# Altium PCB P2_ver1.PcbDoc
Units mm, origin at the board's own origin, x right, y up, seen from the top; angles counter-clockwise.
Board outline 42.75 x 59.76 mm, 2 copper layers (Top Layer, Bottom Layer); 69 components, 47 nets, 239 pads, 32 vias.
Unrouted connection lines stored in the file: 3.
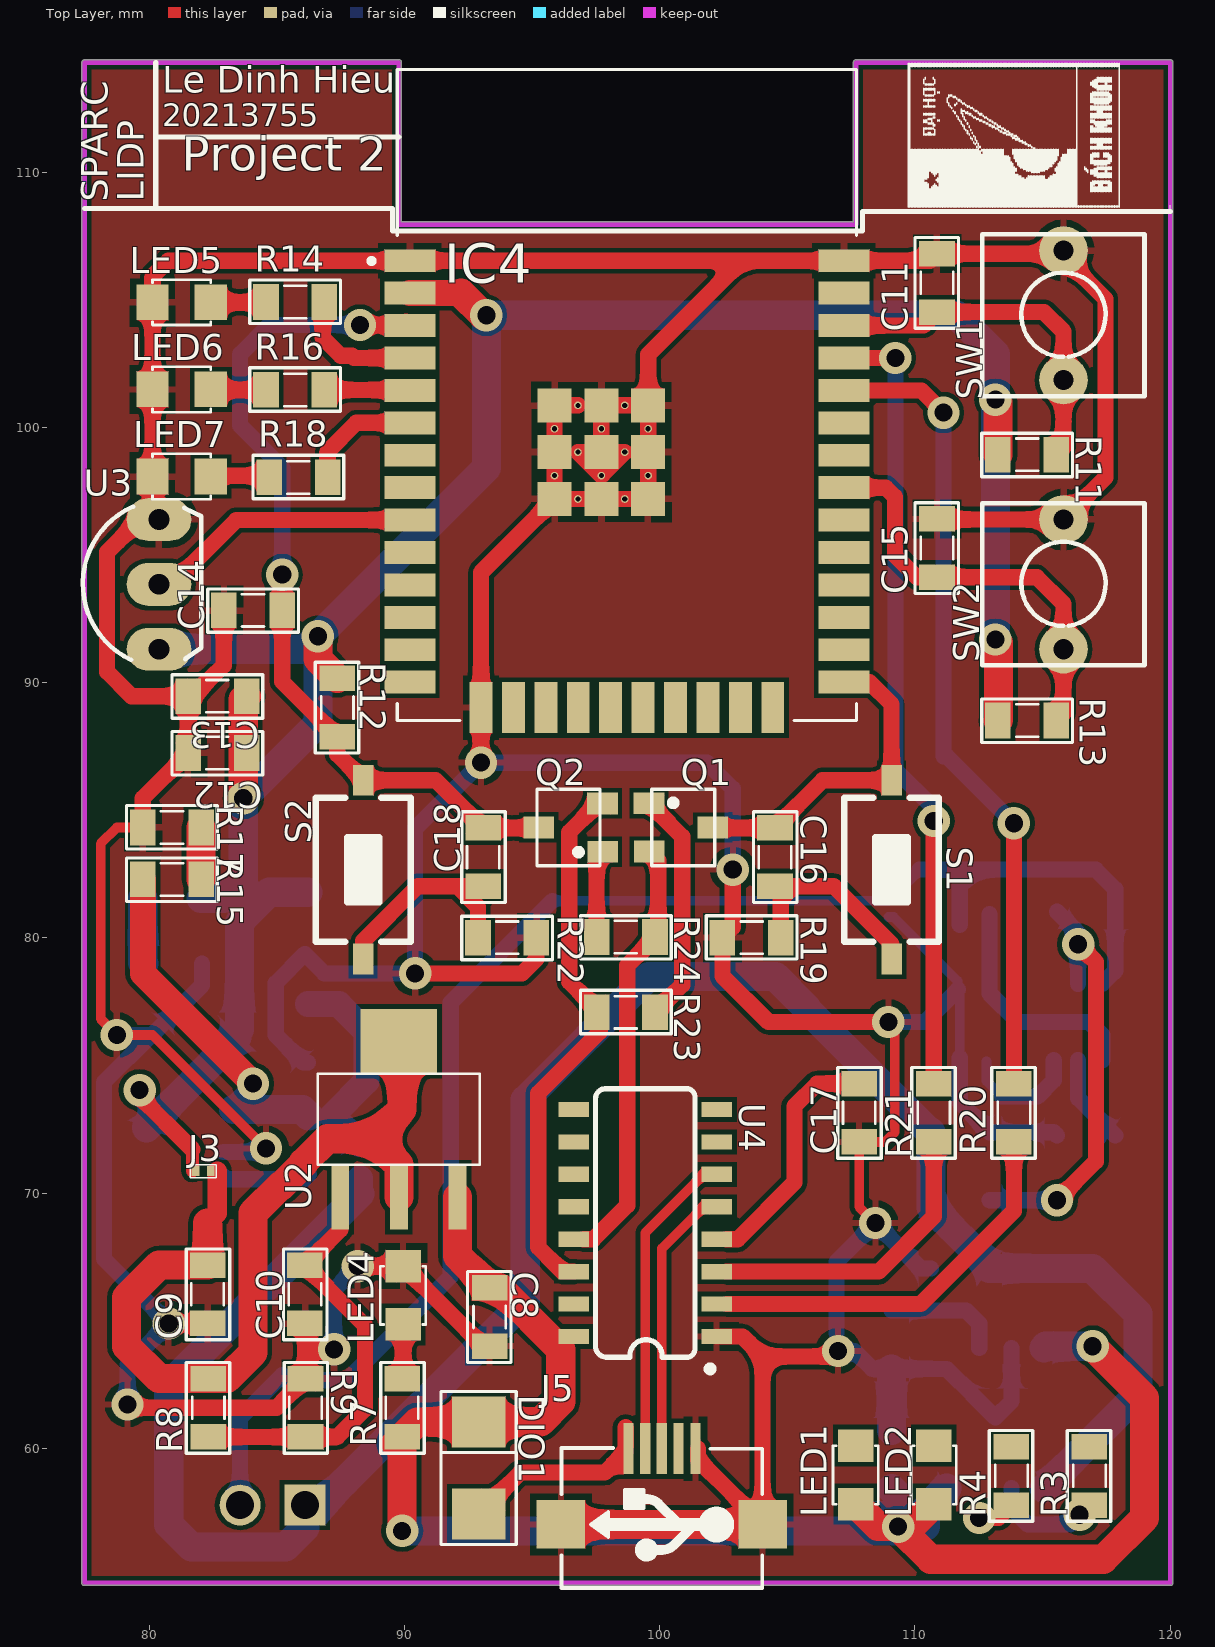
[diagram p0: Top Layer view]
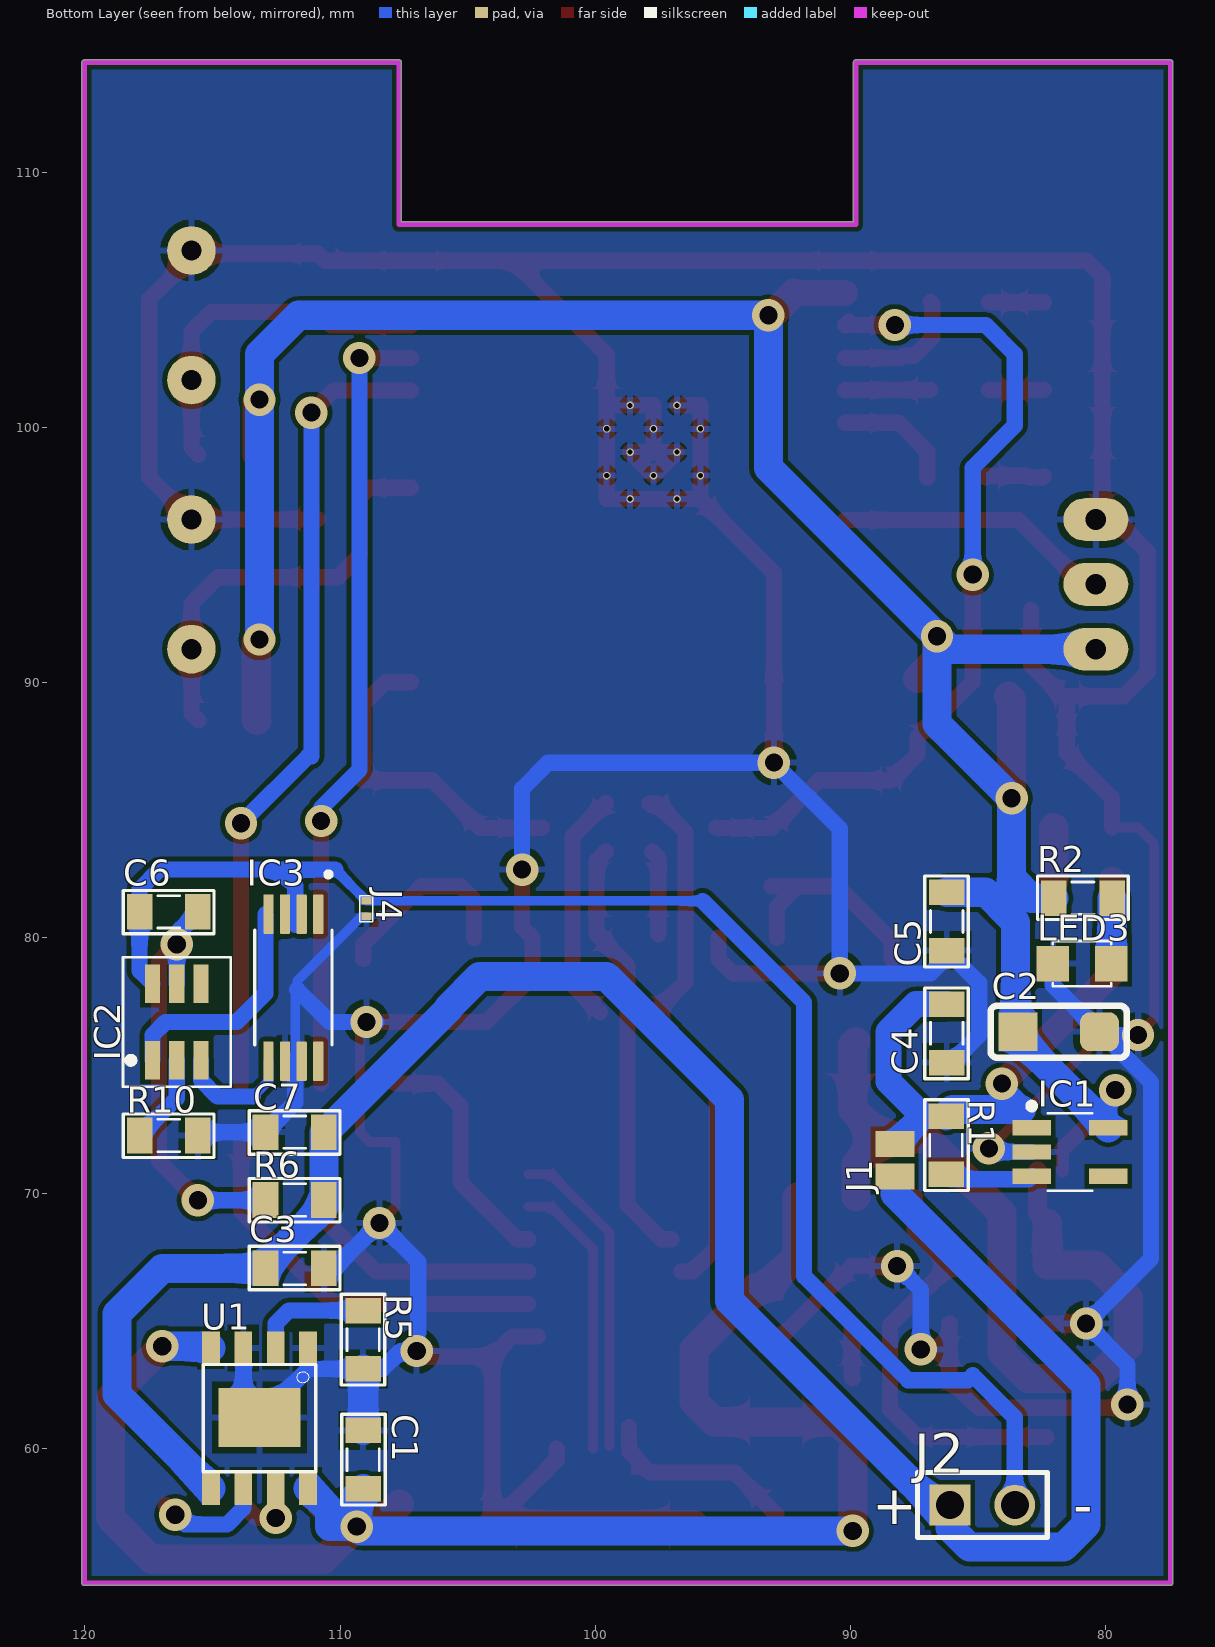
[diagram p1: Bottom Layer view, seen from below]
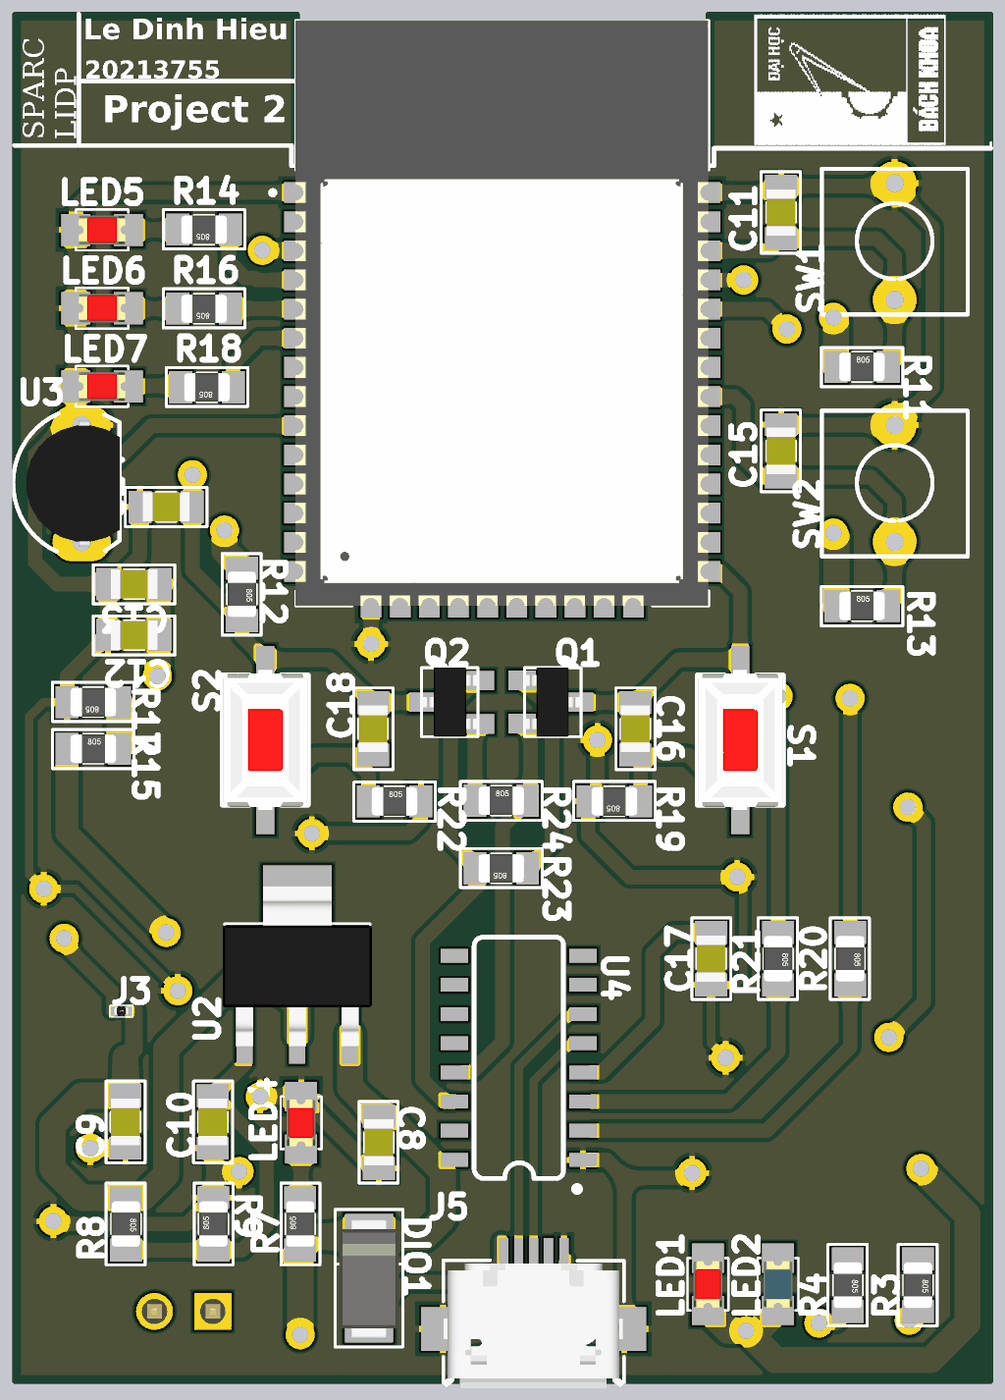
[diagram p2: 3D render of the assembled board from above, using the file's embedded part models]
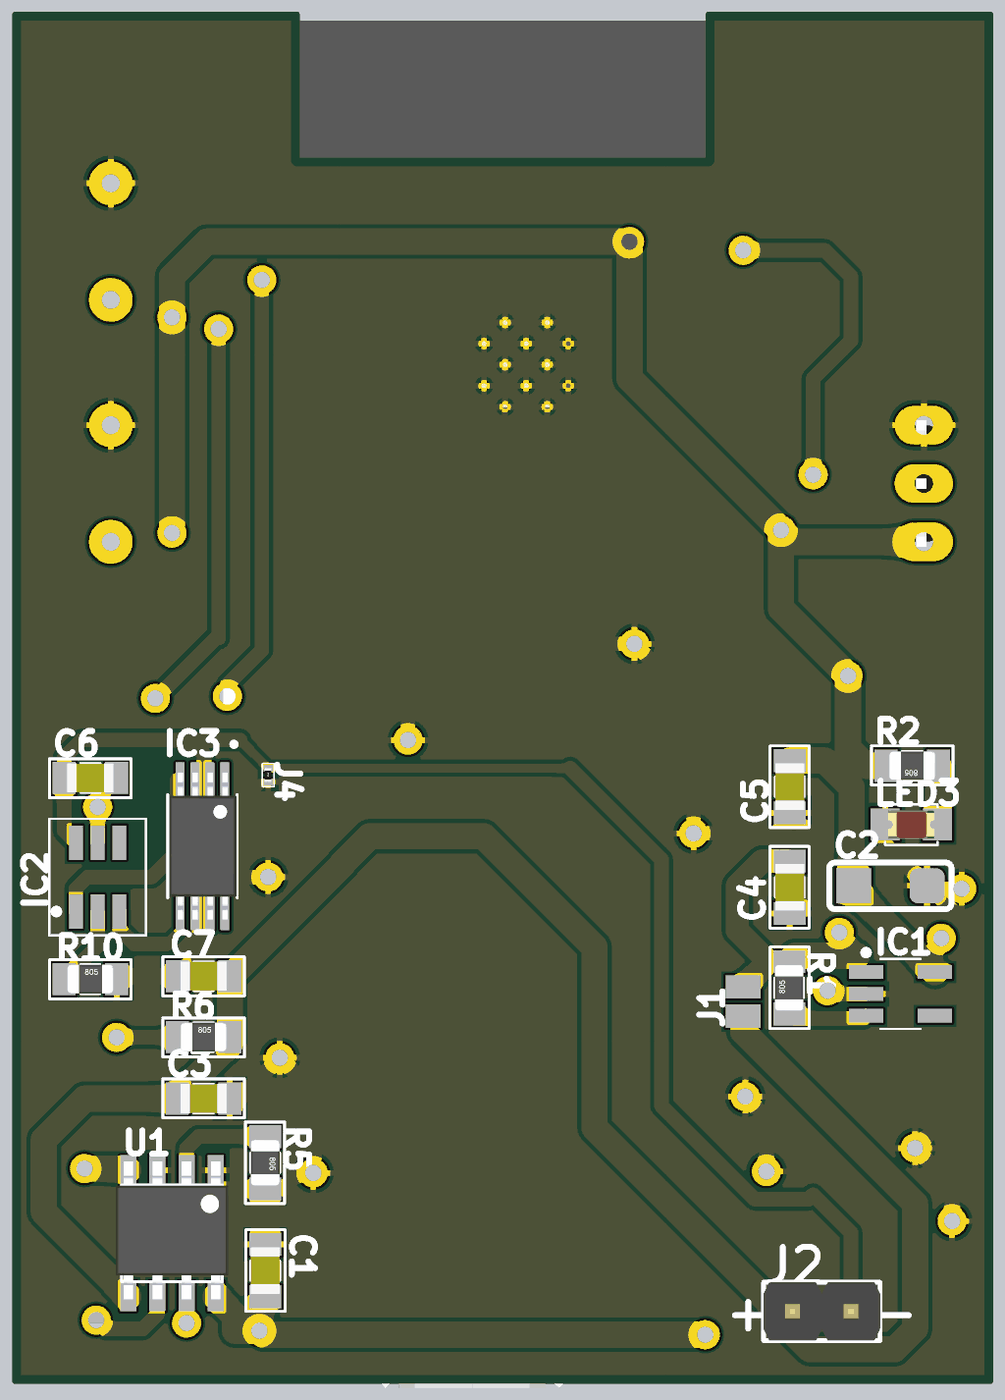
[diagram p3: 3D render of the assembled board from below, using the file's embedded part models]

## Layer stack, top to bottom
Top Solder: solder mask 0.0102, Solder Resist, Dk 3.5
Top Layer: signal copper 0.0356
Dielectric 1: dielectric 0.32, FR-4, Dk 4.8
Bottom Layer: signal copper 0.0356
Bottom Solder: solder mask 0.0102, Solder Resist, Dk 3.5

## Board outline
77.37,54.737 77.37,114.3 cw(c77.47,114.3) 77.47,114.4 89.789,114.4 cw(c89.789,114.3) 89.889,114.3 89.889,108.05 107.596,108.05 107.596,114.3 cw(c107.696,114.3) 107.696,114.4 120.015,114.4 cw(c120.015,114.3) 120.115,114.3 120.115,54.737 cw(c120.015,54.737) 120.015,54.637 77.47,54.637 cw(c77.47,54.737)

## Design rules (kind name [scope] priority, off if disabled: settings)
Clearance [All] p1: gap=0.178 ignorepadtopadclearanceinfootprint=FALSE
PolygonConnect [All] p1: connectstyle=Relief reliefconductorwidth=0.254 reliefentries=4 polygonreliefangle="90 Angle" airgapwidth=0.254
RoutingVias [All] p1: holewidth=0.711 width=1.27 viastyle="Through Hole" minholewidth=0.711 minwidth=1.27 maxholewidth=0.711 maxwidth=1.27
SilkToSolderMaskClearance [IsPad] p1: minsilkscreentomaskgap=0.203 clearancetoexposedcopper=TRUE
SolderMaskExpansion [All] p1: expansion=0.102
Width [All] p1: maxlimit=1.143 minlimit=0.381 preferedwidth=0.635
29 further rules are at their usual default settings.

## Classes and differential pairs
component class U_MCU: C11 C12 C13 C14 C15 C16 C17 C18 DIO1 IC4 J5 LED5 LED6 LED7 Q1 Q2 R11 R12 R13 R14 R15 R16 R17 R18 R19 R20 R21 R22 R23 R24 S1 S2 SW1 SW2 U3 U4
component class U_Lipo_Power: C1 C2 C3 C4 C5 C6 C7 C8 C10 IC1 IC2 IC3 J1 J2 J3 J4 LED1 LED2 LED3 LED4 R1 R2 R3 R4 R5 R6 R7 R8 R9 R10 U1 U2

## Components (designator, comment, footprint, x,y, rotation, side; value= is the part's Value field where it differs from the comment)
C1 "104" CAP_0805 109.093,59.563 r90 bottom value=33p
C2 "220uF" CAP_TANTALUM_3216 81.849,76.327 r180 bottom
C3 "104" CAP_0805 111.779,67.056 r0 bottom value=33p
C4 "1uF" CAP_0805 86.233,76.263 r270 bottom value=33p
C5 "1uF" CAP_0805 86.233,80.645 r270 bottom value=33p
C6 "100nF" CAP_0805 116.713,81.026 r180 bottom value=33p
C7 "100nF" CAP_0805 111.779,72.39 r180 bottom value=33p
C8 "104" CAP_0805 93.345,65.151 r270 top value=33p
C9 "104" CAP_0805 82.296,66.04 r90 top value=33p
C10 "104" CAP_0805 86.106,66.04 r90 top value=33p
C11 "104" CAP_0805 110.871,105.664 r270 top value=33p
C12 "22uF" CAP_0805 82.677,87.249 r0 top value=33p
C13 "0.1uF" CAP_0805 82.677,89.471 r0 top value=33p
C14 "0.1uF" CAP_0805 84.074,92.837 r0 top value=33p
C15 "104" CAP_0805 110.871,95.275 r270 top value=33p
C16 "104" CAP_0805 104.521,83.168 r90 top value=33p
C17 "0.1uF" CAP_0805 107.823,73.152 r90 top value=33p
C18 "104" CAP_0805 93.091,83.168 r90 top value=33p
DIO1 "Diode SMD" DIO-214AC(SMA) 92.964,59.309 r270 top value=1N5007
IC1 "RT9013" SOT23-5 81.407,71.615 r180 bottom
IC2 "DW01A" SOT23-6 116.397,76.708 r90 bottom
IC3 "FS8205A" FS8205A 111.887,78.052 r270 bottom
IC4 "ESP32-WROOM-32" MODULE_ESP32-WROOM-32 98.72,101.271 r0 top
J1 "Jumper2" JUMPER2 88.265,71.92 r90 bottom
J2 "VBAT_IN" JP2-D1T 86.106,57.785 r180 bottom
J3 "Jumper2" RES-SMD-0201 82.123,70.866 r180 top
J4 "Jumper2" RES-SMD-0201 108.966,81.153 r270 bottom
J5 "USB-5" USB-M1 100.089,59.991 r180 top
LED1 "LED" LED-0805-Red 107.683,57.823 r90 top value="LED 3 ly Single Colour"
LED2 "LED" LED-0805-Blue 110.74,57.823 r90 top value="LED 3 ly Single Colour"
LED3 "" LED-0805-Red 79.792,78.994 r0 bottom value="LED 3 ly Single Colour"
LED4 "LED" LED-0805-Red 89.954,64.859 r90 top value="LED 3 ly Single Colour"
LED5 "LED" LED-0805-Red 82.423,104.902 r180 top value="LED 3 ly Single Colour"
LED6 "LED" LED-0805-Red 82.423,101.492 r180 top value="LED 3 ly Single Colour"
LED7 "LED" LED-0805-Red 82.423,98.082 r180 top value="LED 3 ly Single Colour"
Q1 "2SC1815" SOT23D 100.838,84.328 r270 top value=C1815
Q2 "2SC1815" SOT23D 96.52,84.328 r90 top value=C1815
R1 "10k" RES-SMD-0805 86.258,71.882 r90 bottom
R2 "1k" RES-SMD-0805 80.897,81.559 r0 bottom
R3 "1000" RES-SMD-0805 116.84,58.928 r270 top
R4 "1000" RES-SMD-0805 113.784,58.928 r270 top
R5 "1200" RES-SMD-0805 109.093,64.262 r270 bottom
R6 "0.1k" RES-SMD-0805 111.779,69.736 r180 bottom
R7 "500" RES-SMD-0805 89.916,61.595 r90 top
R8 "Resistor - SMD" RES-SMD-0805 82.321,61.595 r270 top
R9 "Resistor - SMD" RES-SMD-0805 86.131,61.595 r90 top
R10 "1k" RES-SMD-0805 116.713,72.263 r180 bottom
R11 "Resistor - SMD" RES-SMD-0805 114.402,98.933 r0 top
R12 "10K" RES-SMD-0805 87.376,89.027 r270 top
R13 "Resistor - SMD" RES-SMD-0805 114.402,88.519 r0 top
R14 "1000" RES-SMD-0805 85.725,104.915 r180 top
R15 "Resistor - SMD" RES-SMD-0805 80.899,82.296 r0 top
R16 "1000" RES-SMD-0805 85.725,101.473 r180 top
R17 "Resistor - SMD" RES-SMD-0805 80.899,84.328 r180 top
R18 "1000" RES-SMD-0805 85.852,98.044 r180 top
R19 "10k" RES-SMD-0805 103.607,80.01 r180 top
R20 "0R" RES-SMD-0805 113.881,73.152 r270 top
R21 "0R" RES-SMD-0805 110.744,73.152 r270 top
R22 "10k" RES-SMD-0805 94.031,80.01 r0 top
R23 "1000" RES-SMD-0805 98.679,77.089 r180 top
R24 "1000" RES-SMD-0805 98.679,80.035 r0 top
S1 "SW-SMD" SW-SMD 109.093,82.677 r90 top
S2 "SW-SMD" SW-SMD 88.392,82.677 r90 top
SW1 "SW" SW2 115.824,106.934 r270 top value="SW chip 2 pin"
SW2 "SW" SW2 115.824,96.393 r270 top value="SW chip 2 pin"
U1 "TP4056" TP4056 113.157,61.189 r270 bottom
U2 "LM1117-ADJ" LM1117-SOP 89.789,71.12 r0 top
U3 "LM35" QTO-92 80.391,93.853 r90 top
U4 "CH340C" SOP-16 99.441,68.834 r90 top

## Footprints (in the part's own frame and the unit in brackets; to place one, negate y for a bottom-side part, rotate by r counter-clockwise, add the part's x,y. Pads: shape width x height; smd on the part's side, far side on the other; paste and mask are expansions set on the pad)
CAP_0805 [mil]
  rect 39.37x55 smd: 1(-45,0) 2(45,0)
  silkscreen extent -70,-34 70,33, body extent -40,-25 40,25, height 24
CAP_TANTALUM_3216 [mil]
  rect 60x60 smd: 1(-62.99,0)
  rrect50% 60x60 smd: 2(62.99,0)
  silkscreen extent -105,-40 105,40, body extent -67,-35 67,35, height 67
DIO-214AC(SMA) [mm] "DO-214AC Diode Smallest Size"
  rect 2x2.1 smd: 1(1.88,-0.051) 2(-1.732,-0.051)
  silkscreen extent -2.92,-1.52 3.07,1.42, body extent -2.5,-1.35 2.7,1.25, height 2.4
FS8205A [mm]
  rrect25% 1.56x0.4 smd: 1(-2.88,1.031) 2(-2.88,0.381) 3(-2.88,-0.269) 4(-2.88,-0.919) 5(2.88,-0.919) 6(2.88,-0.269) 7(2.88,0.381) 8(2.88,1.031)
  silkscreen extent -4.54,-1.46 2.25,1.57, body extent -3.2,-1.4 3.2,1.53, height 1.2
JP2-D1T [mm] "2 pins, 1 row, straight, gold plating"
  rect 1.6x1.6 hole 1.1: 1(0,0)
  round 1.6 hole 1.1: 2(2.54,0)
  silkscreen extent -1.27,-1.27 3.81,1.27, body extent -1.27,-1.27 3.81,1.27, height 8.54
JUMPER2 [mil]
  rect 40x60 smd: 1(-50,0) 2(0,0)
LED-0805-Blue [mil]
  rect 50x55 smd: 1(0,0) 2(90,0)
  silkscreen extent 0,-35 90,35, body extent 5,-25 85,25, height 43
LED-0805-Red [mil]
  rect 50x55 smd: 1(0,0) 2(90,0)
  silkscreen extent 0,-35 90,35, body extent 5,-25 85,25, height 43
LM1117-SOP [mm]
  rect 0.7x2.54 smd: 1(-2.3,-1.27) 2(0,-1.27) 3(2.3,-1.27)
  rect 3x2.54 smd: 2(0,4.826)
  silkscreen extent -3.17,0 3.17,3.56, body extent -3.25,-1.78 3.25,5.18, height 1.68
MODULE_ESP32-WROOM-32 [mm]
  rect 2x0.9 smd: 1(-8.5,5.26) 2(-8.5,3.99) 3(-8.5,2.72) 4(-8.5,1.45) 5(-8.5,0.18) 6(-8.5,-1.09) 7(-8.5,-2.36) 8(-8.5,-3.63) 9(-8.5,-4.9) 10(-8.5,-6.17) 11(-8.5,-7.44) 12(-8.5,-8.71) 13(-8.5,-9.98) 14(-8.5,-11.25) 25(8.5,-11.25) 26(8.5,-9.98) 27(8.5,-8.71) 28(8.5,-7.44) 29(8.5,-6.17) 30(8.5,-4.9) 31(8.5,-3.63) 32(8.5,-2.36) 33(8.5,-1.09) 34(8.5,0.18) 35(8.5,1.45) 36(8.5,2.72) 37(8.5,3.99) 38(8.5,5.26)
  rect 0.9x2 smd: 15(-5.715,-12.25) 16(-4.445,-12.25) 17(-3.175,-12.25) 18(-1.905,-12.25) 19(-0.635,-12.25) 20(0.635,-12.25) 21(1.905,-12.25) 22(3.175,-12.25) 23(4.445,-12.25) 24(5.715,-12.25)
  rect 1.33x1.33 smd: 39_1(-2.835,-0.405) 39_2(-1,-0.405) 39_3(0.835,-0.405) 39_4(-2.835,-2.24) 39_5(-1,-2.24) 39_6(0.835,-2.24) 39_7(-2.835,-4.075) 39_8(-1,-4.075) 39_9(0.835,-4.075)
  round 0.3 hole 0.2: 39_10(-1.917,-0.405) 39_11(-0.082,-0.405) 39_12(-2.835,-1.322) 39_13(-1,-1.322) 39_14(0.835,-1.322) 39_15(-1.917,-2.24) 39_16(-0.082,-2.24) 39_17(-2.835,-3.157) 39_18(-1,-3.157) 39_19(0.835,-3.157) 39_20(-1.917,-4.075) 39_21(-0.082,-4.075)
  silkscreen extent -10.1,-12.75 9,12.75, body extent -9.02,-12.75 8.98,12.75, height 3.2
QTO-92 [mil] "TO-92"
  oval 66x100 hole 32: 1(-100,0) 2(0,0) 3(100,0)
  silkscreen extent -117,-65 120,118, body extent -109,-66 109,95, height 245
RES-SMD-0201 [mm]
  rect 0.3x0.4 smd: 1(-0.3,0) 2(0.3,0)
  silkscreen extent -0.51,-0.25 0.51,0.25, body extent -0.3,-0.15 0.3,0.15, height 0.22
RES-SMD-0805 [mil]
  rect 39.37x55 smd: 1(-45,0) 2(45,0)
  silkscreen extent -70,-34 70,33, body extent -39,-25 39,25, height 31
SOP-16 [mm]
  rect 0.6x1.2 smd: 1(-4.445,-2.8) 2(-3.175,-2.8) 3(-1.905,-2.8) 4(-0.635,-2.8) 5(0.635,-2.8) 6(1.905,-2.8) 7(3.175,-2.8) 8(4.445,-2.8) 9(4.445,2.8) 10(3.175,2.8) 11(1.905,2.8) 12(0.635,2.8) 13(-0.635,2.8) 14(-1.905,2.8) 15(-3.175,2.8) 16(-4.445,2.8)
  silkscreen extent -5.84,-2.67 5.26,1.95, body extent -4.95,-3.47 4.95,3.47, height 1.75
SOT23-5 [mm] "SOT23, 5-Leads, Body 3.0x3.0mm (max), Pitch 0.95mm, IPC Medium Density"
  rect 1.5x0.6 smd: 1(-1.5,0.95) 2(-1.5,0) 3(-1.5,-0.95) 4(1.5,-0.95) 5(1.5,0.95)
  silkscreen extent -1.63,-1.52 0.87,1.92, body extent -1.75,-1.52 1.75,1.53, height 1.45
SOT23-6 [mm] "SOT23, 5-Leads, Body 3.0x3.0mm (max), Pitch 0.95mm, IPC Medium Density"
  rect 1.5x0.6 smd: 1(-1.5,0.95) 2(-1.5,0) 3(-1.5,-0.95) 4(1.5,-0.95) 5(1.5,0) 6(1.5,0.95)
  silkscreen extent -2.54,-2.11 2.54,2.11, body extent -1.75,-1.52 1.75,1.53, height 1.45
SOT23D [mm] "SOT 23C - 1-3-2 - BCE"
  rect 0.85x1.2 smd: 1(-0.95,-1.25) 2(0.94,-1.245) 3(0,1.25)
  silkscreen extent -1.5,-1.14 1.5,1.32, body extent -1.5,-1.17 1.5,1.33, height 1.06
SW2 [mil] "SW button 2pin, 250x 250 mil"
  round 75 hole 31: 1(0,0) 2(200,0)
  silkscreen extent -25,-125 225,125
SW-SMD [mm] "Switch SMD type"
  rect 1.2x0.8 smd: 1(-3.5,0) 2(3.5,0)
  silkscreen extent -2.82,-1.85 2.82,1.85, body extent -3.05,-1.85 3.05,1.85, height 2.5
TP4056 [mm]
  rect 1.3x0.7 smd: 1(-2.75,1.905) 2(-2.75,0.635) 3(-2.75,-0.635) 4(-2.75,-1.905) 5(2.75,-1.905) 6(2.75,-0.635) 7(2.75,0.635) 8(2.75,1.905)
  rect 2.3x3.2 smd: 3(-0.025,0)
  silkscreen extent -2.1,-2.2 2.1,2.2, body extent -3.13,-2.45 2.87,2.45, height 1.75
USB-M1 [mm]
  rect 0.4x2 smd: 1(1.3,0) 2(0.65,0) 3(0,0) 4(-0.65,0) 5(-1.321,0)
  rect 1.9x1.9 smd: 5(-3.95,2.968) 5(3.95,2.968)
  silkscreen extent -3.94,-0.03 3.94,5.46, body extent -3.98,0.11 4,5.54, height 2.71

## Part data
C1 C3 C4 C5 C6 C7 C8 C9 C10 C11 C12 C13 C14 C15 C16 C17 C18: library part CapSMD, "Capacitor", LatestRevisionDate=17-Jul-2002, LatestRevisionNote="Re-released for DXP Platform.", PackageReference=RAD-0.3, Published=8-Jun-2000, Publisher="Altium Limited"
C2: library part "Cap Pol", "Polarized Capacitor (Axial)", LatestRevisionDate=17-Jul-2002, LatestRevisionNote="Re-released for DXP Platform.", PackageReference=POLAR0.8, Published=8-Jun-2000, Publisher="Altium Limited"
DIO1: "Default Diode", Code - JEDEC=DO-214-AB, Published=8-Jun-2000, Publisher="Altium Limited", Revision="July-2002: Re-released for DXP Platform."
IC1: "https://linhkien.cxt.vn/5435-rt9013-33gb-ic-reg-linear-33v-500ma-sot23-5.html"
IC2: "One Cell Lithium-ion/Polymer Battery Protection IC"
IC4: "Bluetooth, WiFi Transceiver Module 2.4GHz ~ 2.5GHz Surface Mount", Package="Module Espressif Systems", Digi-Key_Part_Number=1904-1010-1-ND, Digi-Key_Purchase_URL=https://www.digikey.com/product-detail/en/espressif-systems/ESP32-WROOM-32/1904-1010-1-ND/8544305?utm_source=snapeda&utm_medium=aggregator&utm_campaign=symbol, MF="Espressif Systems", MP=ESP32-WROOM-32, SnapEDA_Link=https://www.snapeda.com/parts/ESP32-WROOM-32/Espressif%20Systems/view-part/2753322/?ref=snap
J1 J3 J4: "Jumper, 2-Pin"
J2: library part JP2, "WR-PHD 2.54 mm Angled Socket Header", Manufacturer="Würth Elektronik eiSos GmbH", partNo=613002143121, ComponentLink1 Description=Manufacturer, ComponentLink1URL=http://www.we-online.com, ComponentLink2 Description=Datasheet, ComponentLink2URL=http://katalog.we-online.de/em/datasheet/6130xx143121.pdf, Created by="Karrer Zheng", Created Date="29 March 2013", NoPins=02
J5: Manufacturer=FCI, Manufacturer Part Number=10118193-0001LF, Supplier Part Number 1=609-4616-1-ND, .Checked PCB=RF, .Checked SCH=MM, .Creator=MM, Category="Connectors, Interconnects", ComponentLink1Description=http://portal.fciconnect.com/Comergent//fci/drawing/10118193.pdf, ComponentLink1URL=http://portal.fciconnect.com/Comergent//fci/drawing/10118193.pdf, Connector Type="USB - micro B", Features="Shielded, Solder Retention", Gender=Receptacle, Ingress Protection=-, Mounting Type="Surface Mount, Right Angle, Horizontal", Number of Contacts=5, Packaging="Cut Tape (CT)", Pricing 1="1=0.46, 10=0.433, 25=0.3712, 50=0.3156, 100=0.3032, 250=0.27224, 500=0.25988 (USD)", RoHS="RoHS Compliant", Specifications="USB 2.0", Stock 1=28642, Supplier 1=Digi-Key
LED1 LED2 LED4 LED5 LED6 LED7: "LED Single colour Green and Red"
LED3: library part LED, "LED Single colour Green and Red"
Q1 Q2: library part C1815, "NPN 600mW, ECB", =C2383
R1: library part "Resistor - SMD", "Resistor", Manufacturer="Generic Components", Class=Passive, Published=08/06/2000, Publisher="Altium Hobart Technology Centre"
R2 R3 R4 R5 R6 R7 R10 R12 R14 R16 R18 R19 R20 R21 R22 R23 R24: library part "Resistor - SMD", "Resistor SMD", Manufacturer="Generic Components", Class=Passive, Published=08/06/2000, Publisher="Altium Hobart Technology Centre"
R8 R9 R11 R13 R15 R17: "Resistor SMD", Manufacturer="Generic Components", Class=Passive, Published=08/06/2000, Publisher="Altium Hobart Technology Centre"
S1 S2: "Switch", LatestRevisionDate=17-Jul-2002, LatestRevisionNote="Re-released for DXP Platform.", PackageReference=SPST-2, Published=24-Mar-1999, Publisher="Altium Limited"
SW1 SW2: library part SW2, "Switch button 2 pin"
U1: "Complete single cell Li-Ion battery with a constant current / constant voltage linear charger"
U2: "800mA Low-Dropout Linear Regulator", Creator="Nguyen Ba Bien", Website=http://group3i.net
U3: "Teminal"
U4: "USB to serial chip CH340", Package=Package, Availability=Unavailable, Check_prices=https://www.snapeda.com/parts/CH340C/WCH/view-part/5428851/?ref=eda, MF=WCH, MP=CH340C, Price=None, SnapEDA_Link=https://www.snapeda.com/parts/CH340C/WCH/view-part/5428851/?ref=snap

## Via types
v1: diameter 1.27, hole 0.711, Top Layer to Bottom Layer, 32 vias

## Nets (pads, with @x,y where several pads share a name; then routed paths per layer and width w, separated by ;. In a path a pad name is that pad's centre, name@x,y a point inside that pad or via, vN(x,y) a via of type N, cw(c..) or ccw(c..) an arc to the next point about the centre after c; other vN are vias at no path point)
3V3: C2.1 C5.1 C12.2 C13.2 IC1.5 IC4.2 J3.2 R2.2 R11.1 R12.1 R13.1 U3.1 | length 101.1
  Top Layer w0.508: J3.2@81.702,70.866 81.702,71.714
  Top Layer w0.635: v1(79.629,74.041) 79.502,73.914 81.702,71.714
  Top Layer w1.016: IC4.2 92.224,105.261
  Top Layer w1.143: v1(83.693,85.471) 83.693,89.345 C13.2 ; v1(86.614,91.821) 86.614,90.932 R12.1 ; 92.224,105.261 93.091,104.394 v1(93.218,104.394) ; v1(113.157,91.694) 113.284,91.567 113.284,88.544 R13.1 ; v1(113.157,101.092) 113.259,100.99 R11.1
  Bottom Layer w0.635: v1(79.629,74.041) 79.756,74.041 79.907,73.89 IC1.5
  Bottom Layer w1.143: IC1.5 83.449,76.108 C2.1 83.539,76.416 83.539,80.618 83.693,80.772 ; U3.1 86.106,91.313 v1(86.614,91.821) ; R2.2 82.906,81.559 83.693,82.347 ; C5.1 84.709,81.788 83.693,80.772 ; v1(113.157,91.694) v1(113.157,101.092) 113.157,102.87 111.633,104.394 v1(93.218,104.394) 93.218,98.425 v1(86.614,91.821) ; 83.693,80.772 83.693,82.347 ; 83.693,82.347 v1(83.693,85.471) 86.614,88.392 v1(86.614,91.821)
+5: C1.1 C8.1 DIO1.2 LED1.1 LED2.1 R7.1 U1.4 U1.8 U2.3 U4.16 | length 68.7
  Top Layer w1.143: v1(89.916,56.769) 89.916,59.944 89.662,60.198 R7.1 90.505,61.041 DIO1.2 95.331,61.041 96.133,61.843 96.133,63.881 93.72,66.294 C8.1 92.089,67.55 U2.3 ; LED1.1 108.565,56.942 v1(109.347,56.942) ; LED2.1 109.858,56.942 v1(109.347,56.942) ; v1(116.967,64.008) 118.999,61.976 118.999,57.277 117.384,55.662 110.626,55.662 v1(109.347,56.942)
  Bottom Layer w1.143: v1(89.916,56.769) 109.174,56.769 v1(109.347,56.942) ; C1.1 109.347,58.166 v1(109.347,56.942) ; U1.8 110.409,57.595 110.409,56.942 v1(109.347,56.942) ; U1.4 115.131,64.008 v1(116.967,64.008)
BAT_MS: R15.2 R17.1 | length 2
  Top Layer w1.143: R15.2 R17.1
Data: C15.2 IC4.31 R13.2 SW2.2 | length 16.5
  Top Layer w0.635: IC4.31 108.861,97.641 109.22,97.282 109.22,94.996 110.084,94.132 C15.2 114.783,94.132 115.824,93.091 SW2.2 115.824,88.798 R13.2
EN: C14.2 C18.2 IC4.3 Q2.3 R12.2 S2.2 | length 33.6
  Top Layer w0.635: v1(85.217,94.234) C14.2 85.217,90.043 R12.2 87.376,87.193 S2.2 91.225,86.177 C18.2 95.253,84.311 Q2.3 ; v1(88.265,104.013) 89.944,104.013 90.071,104.14 IC4.3 IC4.3@90.22,104.013
  Bottom Layer w0.635: v1(85.217,94.234) 85.217,98.425 83.566,100.076 83.566,102.87 84.709,104.013 v1(88.265,104.013)
GND: C1.2 C2.2 C3.1 C4.2 C5.2 C7.1 C8.2 C9.1 C10.1 C11.1 C12.1 C13.1 C14.1 C15.1 C17.1 IC1.2 IC3.6 IC3.7 IC4.1 IC4.15 IC4.38 IC4.39_1 IC4.39_2 IC4.39_3 IC4.39_4 IC4.39_5 IC4.39_6 IC4.39_7 IC4.39_8 IC4.39_9 IC4.39_10 IC4.39_11 IC4.39_12 IC4.39_13 IC4.39_14 IC4.39_15 IC4.39_16 IC4.39_17 IC4.39_18 IC4.39_19 IC4.39_20 IC4.39_21 J4.2 J5.5 LED3.2 LED4.2 LED5.2 LED6.2 LED7.2 R5.2 R9.2 R10.2 R17.2 R19.2 R22.2 SW1.1 SW2.1 U1.1 U1.3 U3.3 U4.1 | length 306
  Top Layer w0.381: R17.2 78.74,84.328 78.105,83.693 78.105,76.835 v1(78.74,76.2) 80.137,76.2 v1(84.582,71.755) ; v1(108.458,68.834) 107.823,69.469 C17.1 108.839,72.009 109.22,72.39 109.22,76.454 v1(108.966,76.708)
  Top Layer w0.635: v1(79.157,61.722) 79.284,61.595 84.988,61.595 R9.2 86.131,63.881 ; R17.2 79.756,85.471 C12.1 C13.1 ; v1(80.772,64.897) C9.1 ; C14.1 82.931,90.678 81.724,89.471 C13.1 ; C10.1 86.131,64.872 86.131,63.881 ; v1(87.249,63.881) 86.131,63.881 ; v1(88.176,67.145) LED4.2 93.091,64.008 C8.2 ; v1(90.424,78.613) 94.615,78.613 95.174,79.172 R22.2 ; v1@93.005,86.655 v1(93.005,86.868) IC4.15 93.005,94.316 IC4.39_7 ; IC4.39_10 IC4.39_1 IC4.39_12 IC4.39_4 IC4.39_17 IC4.39_7 ; J5.5@101.511,59.991 101.511,59.552 104.039,57.023 104.039,63.601 ; U4.1 103.251,64.389 104.039,63.601 ; v1(102.87,82.677) 102.87,80.416 R19.2 102.464,78.511 104.267,76.708 v1(108.966,76.708) ; v1(106.997,63.818) 106.781,63.601 104.039,63.601 ; C15.1 110.896,96.393 SW2.1 117.475,98.044 117.475,105.029 115.697,106.807 C11.1 110.595,106.531 IC4.38 103.229,106.531 ; C13.1 79.311,89.471 78.359,90.424 78.359,95.123 79.629,96.393 U3.3 80.137,96.647 LED7.2 LED6.2 LED5.2 80.137,105.918 80.75,106.531 IC4.1 103.229,106.531 ; IC4.39_7 IC4.39_20 IC4.39_8 IC4.39_21 IC4.39_9 IC4.39_19 IC4.39_6 IC4.39_14 IC4.39_3 ; IC4.39_5 IC4.39_16 IC4.39_18 IC4.39_15 IC4.39_5 ; IC4.39_5 IC4.39_13 IC4.39_2 IC4.39_11 IC4.39_3 ; IC4.39_3 99.555,102.857 103.229,106.531
  Top Layer w1.143: J5.5@96.139,57.023 J5.5@104.039,57.023
  Bottom Layer w0.305: J4.2 109.174,80.853
  Bottom Layer w0.381: J4.2@108.966,80.818 109.174,80.818 111.679,78.313 111.679,77.978 111.76,77.897 111.76,75.311
  Bottom Layer w0.635: v1(78.74,76.2) C2.2@80.082,76.2 ; v1(79.157,61.722) 79.157,63.282 v1(80.772,64.897) 78.232,67.437 78.232,74.35 C2.2@80.082,76.2 ; LED3.2 82.078,78.156 C2.2 80.122,76.2 C2.2@80.082,76.2 ; IC1.2 84.442,71.615 v1(84.582,71.755) ; C4.2 86.042,75.121 84.963,76.2 84.963,78.232 86.106,79.375 86.868,78.613 v1(90.424,78.613) 90.424,84.287 v1(93.005,86.868) 101.854,86.868 102.87,85.852 v1(102.87,82.677) ; v1(87.249,63.881) 87.249,66.218 v1(88.176,67.145) ; 106.934,64.516 106.934,67.31 v1(108.458,68.834) 110.236,67.056 C3.1 ; v1(106.997,63.818) 107.632,63.818 108.331,63.119 R5.2 111.252,63.119 113.157,61.214 113.792,61.849 U1.3@113.792,63.939 ; v1@108.585,76.708 v1(108.966,76.708) 110.409,76.708 111.679,77.978 ; 111.76,75.311 111.76,73.553 C7.1 115.443,72.39 R10.2
  Bottom Layer w1.143: C1.2 R5.2
IO0: C16.2 IC4.25 Q1.3 S1.2 | length 13
  Top Layer w0.635: Q1.3 102.105,84.311 C16.2 106.387,86.177 S1.2 109.093,89.154 108.226,90.021 IC4.25
LED_1: IC4.4 R14.1 | length 5.2
  Top Layer w0.635: R14.1 86.804,104.851 86.804,103.513 87.511,102.806 87.947,102.806 88.033,102.721 IC4.4
LED_2: IC4.5 R16.1 | length 3.4
  Top Layer w0.635: R16.1 90.198,101.473 IC4.5
LED_3: IC4.6 R18.1 | length 4.7
  Top Layer w0.635: R18.1 86.995,99.06 88.116,100.181 IC4.6
NetC4_1: C4.1 IC1.1 J1.2 R1.2 R15.1 | length 22.3
  Top Layer w1.016: R15.1 79.756,78.613 v1(84.074,74.295)
  Bottom Layer w1.016: 83.312,73.279 84.074,74.041 v1(84.074,74.295) ; C4.1 87.439,77.407 88.519,76.327 88.519,74.384 87.16,73.025 J1.2
  Bottom Layer w1.143: 83.312,73.279 86.004,73.279 R1.2
NetC6_1: C6.1 IC2.6 IC3.2 IC3.3 J2.2 J4.1 | length 59.7
  Bottom Layer w0.381: 95.804,81.453 J4.1 110.19,82.677
  Bottom Layer w0.635: J2.2 83.566,61.214 85.217,62.865 85.407,62.674 87.749,62.674 91.821,66.747 91.821,77.47 95.804,81.453 ; 110.19,82.677 112.395,82.677 ; 111.76,80.518 111.76,82.042 112.395,82.677 ; IC2.6 117.856,78.717 C6.1 117.856,81.915 117.094,82.677 112.395,82.677
NetC6_2: C6.2 IC2.5 R6.1 | length 16.8
  Top Layer w0.635: v1(115.57,69.723) 117.094,71.247 117.094,79.059 v1(116.397,79.756)
  Bottom Layer w0.635: R6.1 112.935,69.723 v1(115.57,69.723) ; C6.2 116.397,80.199 v1(116.397,79.756) IC2.5
NetC9_2: C9.2 J3.1 R8.1 U2.2 | length 33.8
  Top Layer w0.762: 82.296,68.834 82.677,69.215 82.677,70.866
  Top Layer w1.143: 82.296,68.834 C9.2 80.391,67.183 79.121,65.913 79.121,64.008 80.391,62.738 R8.1 83.058,62.738 84.074,63.754 84.074,69.222 85.146,70.294 85.187,70.294 86.042,71.15 86.042,71.191 86.988,72.136 88.773,72.136 ; U2.2@89.789,69.85 89.789,71.12 88.773,72.136 ; U2.2@89.789,75.946 89.916,75.819 89.916,73.279 88.773,72.136
NetC10_2: C10.2 R8.2 R9.1 U2.1 | length 16.4
  Top Layer w0.635: R8.2 87.376,60.452 88.456,61.531 88.456,64.833 C10.2 87.489,68.566 U2.1
NetC16_1: C16.1 R19.1 S1.1 | length 7.6
  Top Layer w0.635: R19.1 104.75,81.492 105.283,82.025 106.824,82.025 109.093,79.756 S1.1
NetC17_2: C17.2 U4.4 | length 9.5
  Top Layer w0.635: U4.4@102.622,68.199 103.06,68.199 105.283,70.422 105.283,73.406 106.172,74.295 C17.2
NetC18_1: C18.1 R22.1 S2.1 | length 8.6
  Top Layer w0.635: S2.1 88.392,79.883 90.534,82.025 92.075,82.025 ; R22.1 92.888,81.212 92.075,82.025 ; C18.1 92.075,82.025
NetDIO1_1: DIO1.1 J5.1 | length 7.7
  Top Layer w0.635: DIO1.1 94.539,59.055 97.853,59.055 98.668,59.869 J5.1@98.668,60.101 ; J5.1@98.679,60.101 J5.1@98.679,60.833
NetIC1_3: IC1.3 R1.1 | length 3.5
  Bottom Layer w0.635: IC1.3 83.024,70.549 86.068,70.549 R1.1
NetIC2_1: IC2.1 IC3.4 | length 9.2
  Bottom Layer w0.635: IC3.4@112.928,80.932 112.928,77.826 114.046,76.708 116.84,76.708 117.347,76.201 IC2.1
NetIC2_2: IC2.2 R10.1 | length 3.5
  Bottom Layer w0.635: IC2.2 116.397,73.722 R10.1
NetIC2_3: IC2.3 IC3.5 | length 4.7
  Bottom Layer w0.381: IC3.5 112.806,74.392 113.411,73.787
  Bottom Layer w0.635: 113.411,73.787 114.808,73.787 115.447,74.426 IC2.3
NetIC3_1: IC3.1 IC3.8
NetJ5_2: J5.2 U4.6 | length 12.5
  Top Layer w0.381: J5.2@99.441,60.101 99.441,68.453 101.727,70.739 U4.6 U4.6@102.622,70.739
NetJ5_3: J5.3 U4.5 | length 11.1
  Top Layer w0.381: J5.3 100.089,67.831 101.727,69.469 U4.5 U4.5@102.622,69.469
NetLED1_2: LED1.2 R3.1
NetLED2_2: LED2.2 R4.1
NetLED3_1: LED3.1 R2.1 | length 2.6
  Bottom Layer w1.143: R2.1 79.754,79.032 LED3.1
NetLED4_1: LED4.1 R7.2 | length 2.1
  Top Layer w0.635: R7.2 89.954,62.776 LED4.1
NetLED5_1: LED5.1 R14.2 | length 2.2
  Top Layer w0.635: LED5.1 84.569,104.902 R14.2
NetLED6_1: LED6.1 R16.2 | length 2.2
  Top Layer w0.635: LED6.1 82.442,101.473 R16.2
NetLED7_1: LED7.1 R18.2 | length 2.4
  Top Layer w0.635: LED7.1 82.461,98.044 83.003,98.044 83.066,98.108 84.646,98.108 R18.2
NetQ1_1: Q1.1 R23.1 | length 9.2
  Top Layer w0.635: Q1.1 100.893,83.973 100.893,78.16 R23.1
NetQ1_2: Q1.2 R24.2 U4.13 | length 16.8
  Top Layer w0.635: U4.13@97.022,68.199 97.409,68.199 98.735,69.525 98.735,78.923 R24.2@99.949,80.137 ; Q1.2 99.949,83.033 99.949,80.264 R24.2@99.822,80.137
NetQ2_1: Q2.1 R24.1 | length 3.3
  Top Layer w0.635: R24.1@97.536,80.137 97.536,83.144 Q2.1
NetQ2_2: Q2.2 R23.2 U4.14 | length 21.4
  Top Layer w0.635: U4.14 96.203,66.929 95.25,67.882 95.25,73.914 97.663,76.327 97.663,77.089 96.464,78.288 96.464,84.145 97.587,85.268 Q2.2@97.892,85.268
NetR3_2: R3.2 U1.6 | length 4.7
  Top Layer w0.635: v1(116.459,57.404) 116.586,57.277 116.586,57.531 R3.2
  Bottom Layer w0.635: U1.6 113.792,57.658 114.427,57.023 116.078,57.023 v1(116.459,57.404)
NetR4_2: R4.2 U1.7 | length 1.5
  Top Layer w0.635: v1(112.522,57.277) 113.275,57.277 R4.2
NetR5_1: R5.1 U1.2 | length 4.6
  Bottom Layer w0.635: R5.1 112.014,65.405 112.522,64.897 U1.2
NetR20_2: R20.2 U4.2 | length 15.7
  Top Layer w0.635: U4.2@102.622,65.659 110.236,65.659 113.881,69.304 R20.2@113.881,71.882 ; R20.2@113.754,72.009 R20.2@113.881,71.882 ; R20.2 R20.2@113.881,71.882
NetR21_2: R21.2 U4.3 | length 11.9
  Top Layer w0.635: U4.3@102.622,66.929 108.585,66.929 110.744,69.088 R21.2
Provision: C11.2 IC4.36 R11.2 SW1.2 | length 14.1
  Top Layer w0.635: IC4.36 110.341,103.991 C11.2 115.062,104.521 115.824,103.759 SW1.2 115.824,99.212 R11.2
RXD: IC4.34 R20.1 | length 31.8
  Top Layer w0.635: IC4.34 110.258,101.451 v1(111.125,100.584) ; R20.1 v1(113.881,84.493)
  Bottom Layer w0.635: v1(111.125,100.584) 111.125,87.122 111.252,87.122 v1(113.881,84.493)
Sensor: IC4.9 U3.2 | length 10.9
  Top Layer w0.635: U3.2 80.899,93.853 83.417,96.371 IC4.9
TXD: IC4.35 R21.1 | length 31.1
  Top Layer w0.635: IC4.35 v1(109.242,102.721) ; R21.1 v1(110.744,84.582)
  Bottom Layer w0.635: v1(109.242,102.721) 109.242,86.592 110.744,85.09 v1(110.744,84.582)
VBAT: C3.2 C7.2 J1.1 J2.1 R6.2 U1.5 | length 85.1
  Bottom Layer w1.016: 88.265,69.977 J1.1@88.265,70.587
  Bottom Layer w1.143: 88.265,69.977 80.772,62.484 80.772,57.023 81.661,56.134 85.344,56.134 86.106,56.896 J2.1 86.741,57.785 94.742,65.786 94.742,73.66 99.568,78.486 104.541,78.486 105.727,77.299 105.727,77.246 110.584,72.39 C7.2 R6.2 110.637,69.449 112.922,67.164 C3.2 116.967,67.056 118.745,65.278 118.745,62.122 U1.5
pads on no net: IC1.4 IC2.4 IC4.7 IC4.8 IC4.10 IC4.11 IC4.12 IC4.13 IC4.14 IC4.16 IC4.17 IC4.18 IC4.19 IC4.20 IC4.21 IC4.22 IC4.23 IC4.24 IC4.26 IC4.27 IC4.28 IC4.29 IC4.30 IC4.32 IC4.33 IC4.37 J5.4 U4.7 U4.8 U4.9 U4.10 U4.11 U4.12 U4.15

## Polygon pours and split planes (outlines as drawn)
GND on Bottom Layer "leehie" (solid, remove dead copper, pour order 0): 77.47,114.3 89.789,114.3 89.789,107.95 107.696,107.95 107.696,114.3 120.015,114.3 120.015,54.737 77.47,54.737
GND on Top Layer "leehie" (solid, remove dead copper, pour order 2): 77.47,114.3 89.789,114.3 89.789,107.95 107.696,107.95 107.696,114.3 120.015,114.3 120.015,54.737 77.47,54.737

## Keep-outs
Keep-Out Layer:
  lines w0.2: 89.662,114.3 89.789,114.3 ; 89.789,114.3 77.47,114.3 77.47,54.737 120.015,54.737 120.015,114.3 107.696,114.3 107.696,111.379 107.696,107.95 89.789,107.95 89.789,114.3

## Silkscreen, mask and mechanical layers (free items; w line width, h text height)
Top Overlay:
  drawing of 706 lines, arcs and shapes, not listed
  text "Le Dinh Hieu" at 80.518,112.76 h1.78
  text "20213755" at 80.518,111.506 h1.52
  text "Project 2" at 81.28,109.601 h2.29
  text "SPARC" at 78.74,108.839 h1.78 r90
  text "LIDP" at 80.137,108.839 h1.78 r90
Bottom Overlay:
  text "-" at 80.518,57.023 h1.52
  text "+" at 89.154,57.023 h1.52

## Text inside footprints (layer, text, board x,y; h text height)
IC4: Mechanical 13 "ANTENNA" at 92.72,110.271 h1.78